# Altium PCB HEAT.PcbDoc
Units mil, origin at the board's own origin, x right, y up, seen from the top; angles counter-clockwise.
Board outline 3937.01 x 3937.01 mil, 2 copper layers (Top Layer, Bottom Layer), stack 12.8 mil thick; 126 components, 101 nets, 447 pads, 230 vias.
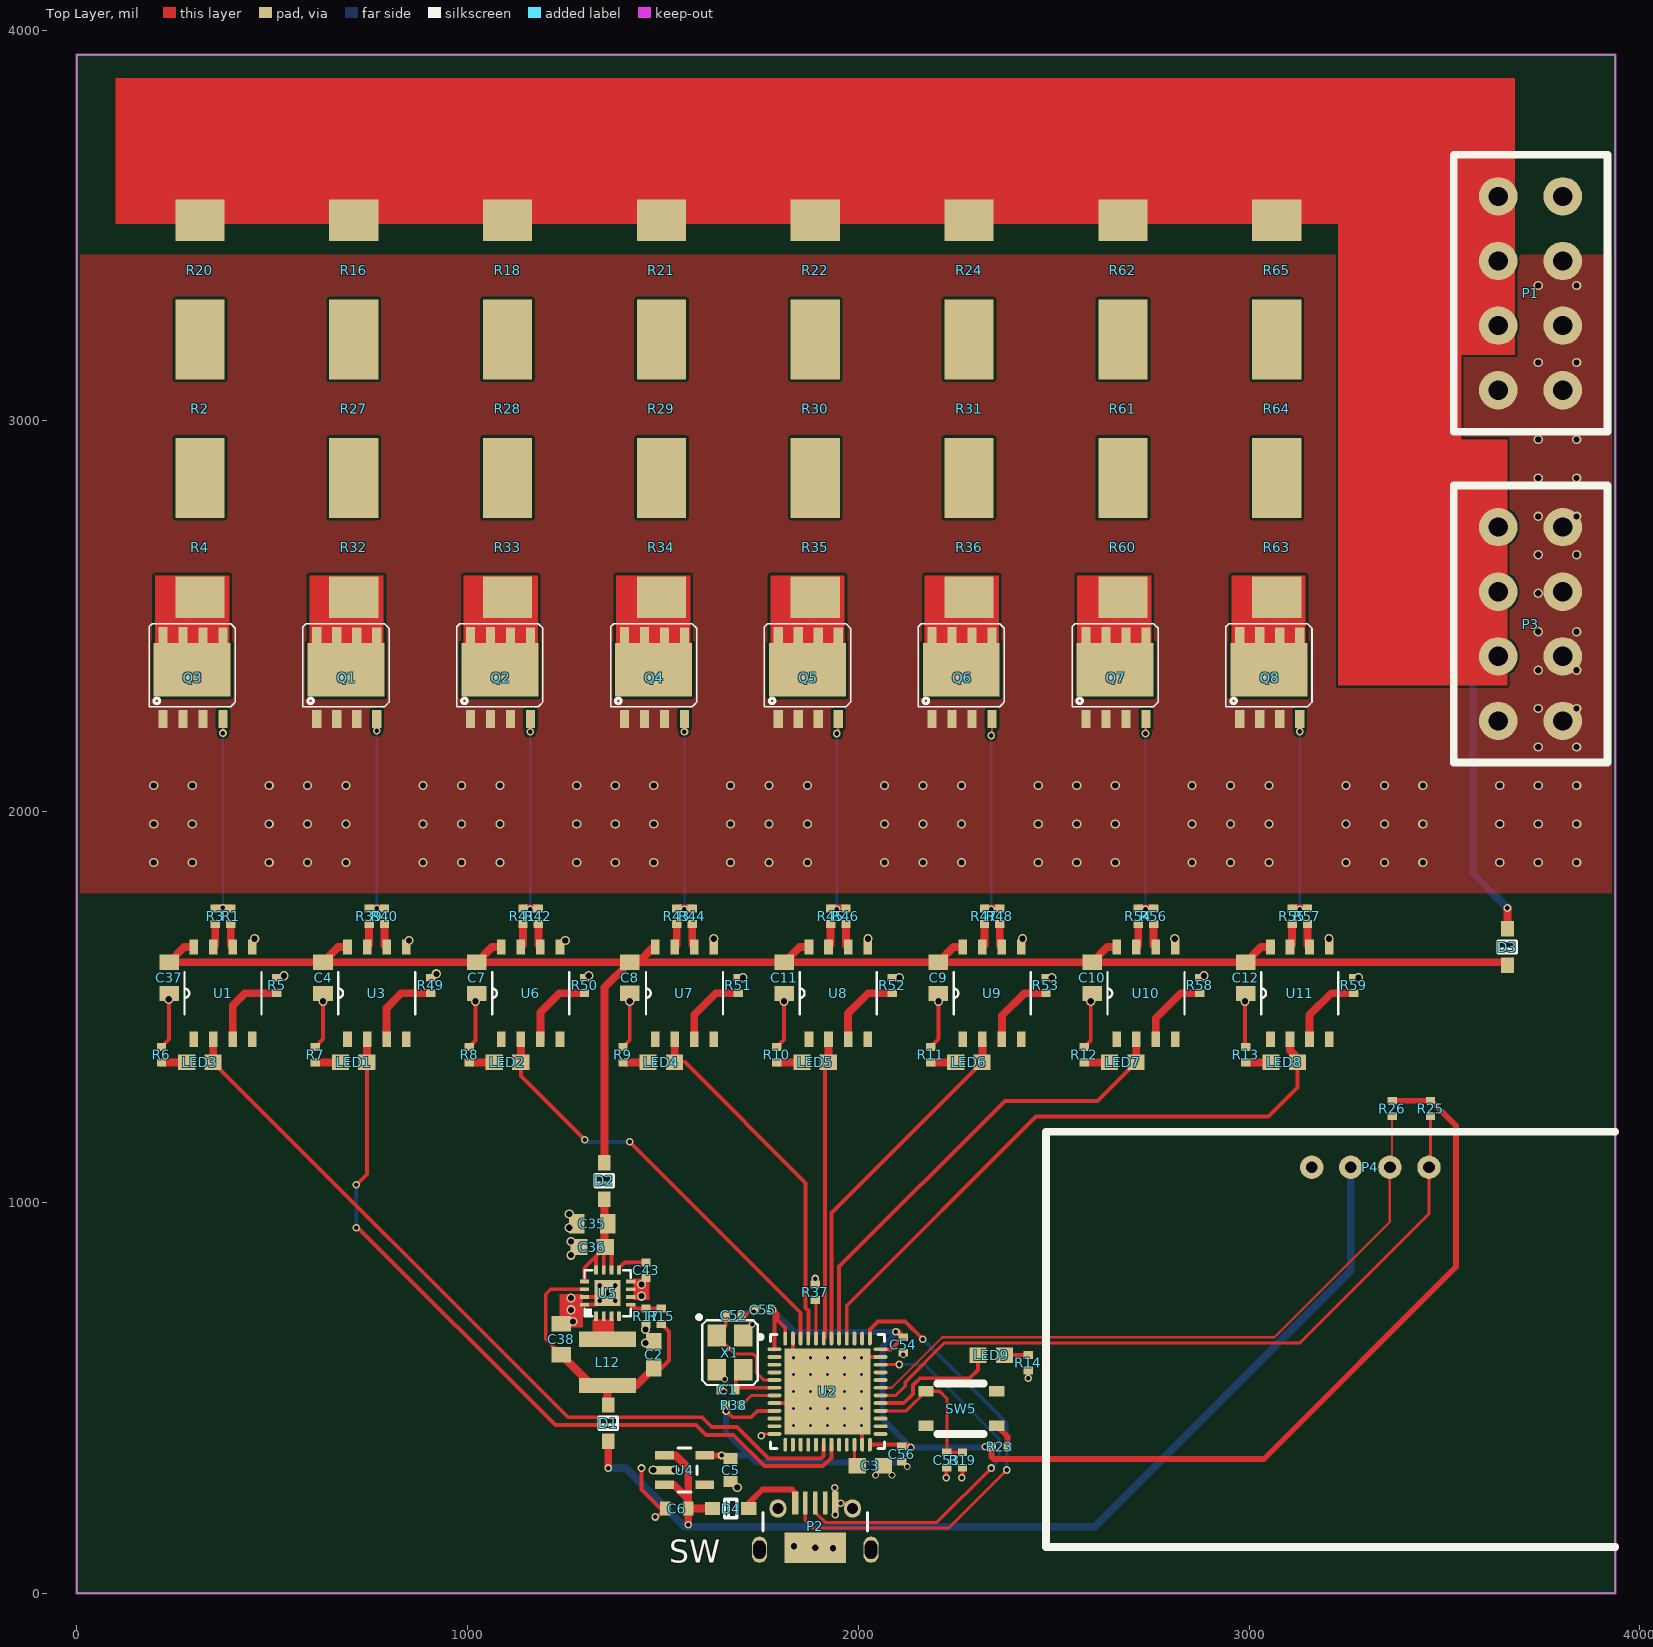
[diagram p0: Top Layer view]
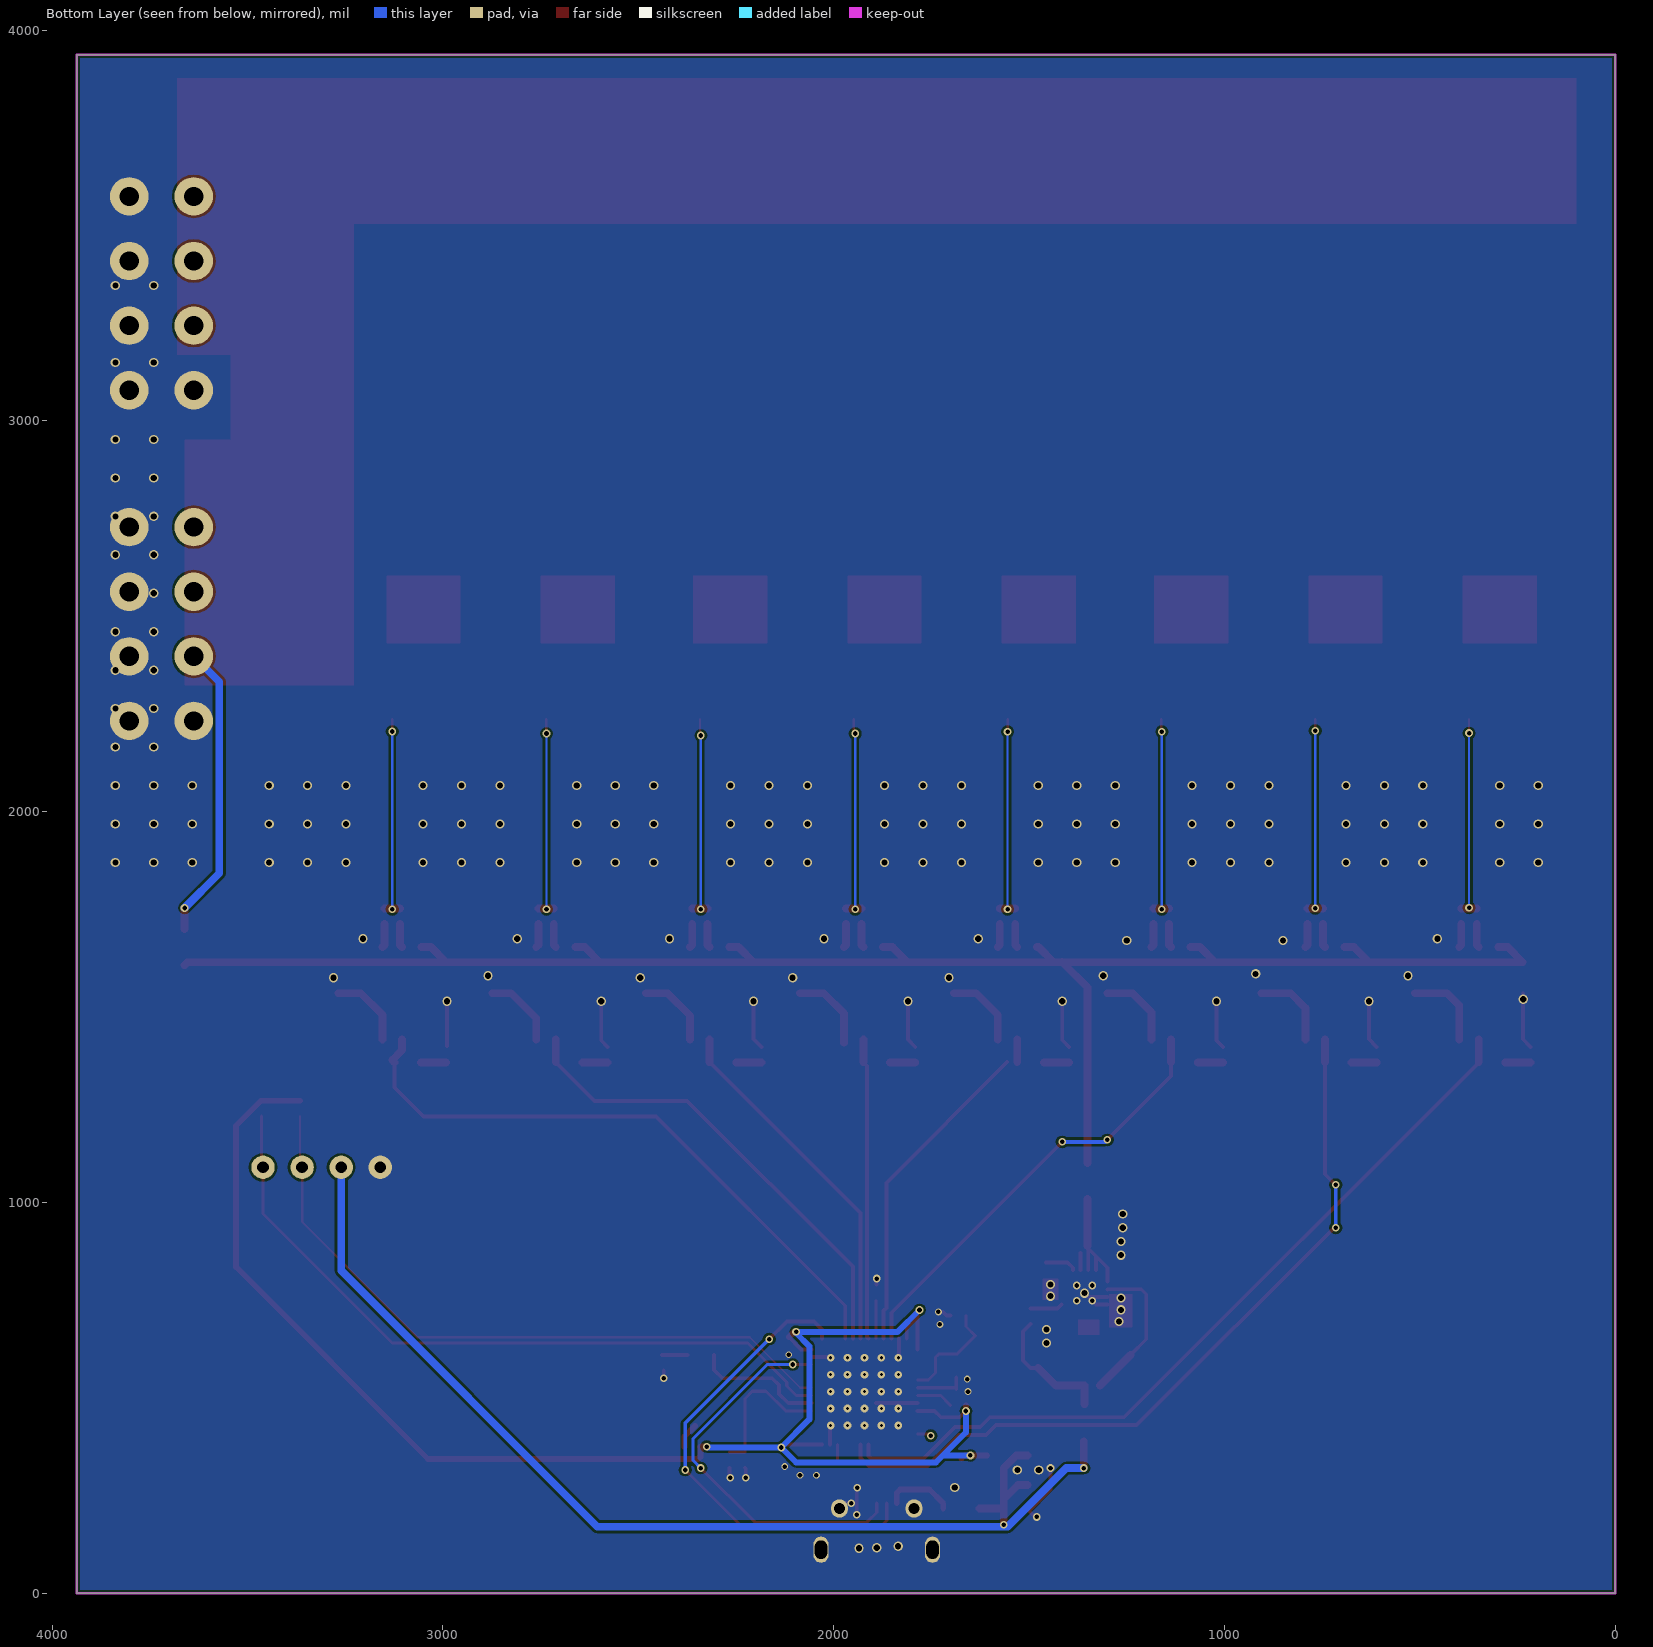
[diagram p1: Bottom Layer view, seen from below]

## Layer stack, top to bottom
Top Solder: solder mask 0.4, Solder Resist, Dk 3.5
Top Layer: signal copper 1.4
Dielectric 1: core 10, FR-4, Dk 4.2
Bottom Layer: signal copper 1.4
Bottom Solder: solder mask 0.4, Solder Resist, Dk 3.5

## Board outline
0,0 3937.01,0 3937.01,3937.01 0,3937.01

## Design rules (kind name [scope] priority, off if disabled: settings)
Clearance Clearance_1 [(InNamedPolygon('Bottom Layer-No Net')) vs Not InNet('GND')] p1: gap=15 ignorepadtopadclearanceinfootprint=FALSE except(0: Arc-Hole Track-Hole SMDPad-Hole THPad-Hole Via-Hole Fill-Hole Poly-Hole Region-Hole Text-Hole)
Clearance [All] p2: gap=6 ignorepadtopadclearanceinfootprint=FALSE except(0: Arc-Hole Track-Hole SMDPad-Hole THPad-Hole Via-Hole Fill-Hole Poly-Hole Region-Hole Text-Hole)
DiffPairsRouting [All] p1: maxlimit=10 minlimit=10 mostfreqgap=10 toplayer_minwidth=5.98 toplayer_maxwidth=15 toplayer_prefwidth=15 bottomlayer_minwidth=5.98 bottomlayer_maxwidth=15 bottomlayer_prefwidth=15 maxuncoupledlength=500
MinimumSolderMaskSliver [All] p1 off: minsoldermaskwidth=10
PlaneClearance [All] p1: clearance=10
PlaneConnect [All] p1: planeconnectstyle=Direct reliefexpansion=20 reliefentries=4 reliefconductorwidth=10 reliefairgap=10
PolygonConnect [All] p1: connectstyle=Direct reliefconductorwidth=10 reliefentries=4 polygonreliefangle="90 Angle" airgapwidth=10
RoomDefinition power [InComponentClass('power')] p1 off: confinementstyle=ConfineIn formatcopy=TRUE lockcomponents=FALSE outline 3977.45,95.87 6398.71,95.87 6398.71,450.2 3977.45,450.2
RoomDefinition HEAT [InComponentClass('HEAT')] p2 off: confinementstyle=ConfineIn formatcopy=TRUE lockcomponents=FALSE outline 3988,65 4608,65 4608,405 3988,405
RoomDefinition MCU [InComponentClass('MCU')] p3 off: confinementstyle=ConfineIn formatcopy=TRUE lockcomponents=FALSE outline 2078,165 4423,165 4423,405 2078,405
RoutingVias [All] p1: holewidth=12 width=20 viastyle="Through Hole" minholewidth=11.81 minwidth=19.68 maxholewidth=28 maxwidth=50
SilkToBoardRegionClearance [All] p1 off:
SilkToSilkClearance [All] p1 off: silktosilkclearance=10
SilkToSolderMaskClearance [IsPad] p1 off: minsilkscreentomaskgap=10 clearancetoexposedcopper=TRUE
SolderMaskExpansion [All] p1: expansion=4
Width [All] p1: maxlimit=60 minlimit=6 preferedwidth=6
23 further rules are at their usual default settings.

## Classes and differential pairs
component class power: C2 C5 C6 C35 C36 C38 C43 D1 D2 L12 R15 R17 U4 U5
component class MCU: C1 C3 C52 C53 C54 C55 C56 D4 LED1 LED2 LED3 LED4 LED5 LED6 LED7 LED8 LED9 P2 P4 R6 R7 R8 R9 R10 R11 R12 R13 R14 R19 R23 R25 R26 R37 R38 SW5 U2 X1
component class HEAT: C4 C7 C8 C9 C10 C11 C12 C37 D3 P1 P3 Q1 Q2 Q3 Q4 Q5 Q6 Q7 Q8 R1 R2 R3 R4 R5 R16 R18 R20 R21 R22 R24 R27 R28 R29 R30 R31 R32 R33 R34 R35 R36 R39 R40 R41 R42 R43 R44 R45 R46 R47 R48 R49 R50 R51 R52 R53 R54 R55 R56 R57 R58 R59 R60 R61 R62 R63 R64 R65 U1 U3 U6 U7 U8 U9 U10 U11

## Components (designator, comment, footprint, x,y, rotation, side; value= is the part's Value field where it differs from the comment)
C1 "Cap" 0402 1666.26,520.75 r0 top value=20pF
C2 "Cap" 0603 1476.38,610.24 r270 top value="4.7uF 25V"
C3 "Cap" 0603 2031.26,325.75 r180 top value=4.7uF
C4 "10uF" 0805 629.92,1574.8 r90 top
C5 "4.7uF" 0603L 1673.23,314.96 r90 top
C6 "4.7uF" 0603L 1535.43,216.54 r0 top
C7 "10uF" 0805 1023.62,1574.8 r90 top
C8 "10uF" 0805 1415,1575 r90 top
C9 "10uF" 0805 2204.72,1574.8 r90 top
C10 "10uF" 0805 2598.43,1574.8 r90 top
C11 "10uF" 0805 1811.02,1574.8 r90 top
C12 "10uF" 0805 2992.13,1574.8 r90 top
C35 "Cap" 0805 1318.9,944.88 r180 top value="22uF 25V"
C36 "Cap" 0603 1318.9,885.83 r180 top value="4.7uF 25V"
C37 "10uF" 0805 236.22,1574.8 r90 top
C38 "Cap" 0805 1240.16,649.61 r270 top value="22uF 25V"
C43 "3.3nF" 0402 1456.69,826.77 r270 top
C52 "Cap" 0402 1681.26,710.75 r180 top value=20pF
C53 "Cap" 0402 2226.81,340.51 r90 top value=10nF
C54 "Cap" 0402 2115,635 r90 top value=0.1uF
C55 "Cap" 0402 1755,725 r0 top value=0.1uF
C56 "Cap" 0402 2111.26,355.75 r90 top value=0.1uF
D1 "Diode 1N4148" LC-SOD-323 1360,435 r90 top
D2 "Diode 1N4148" LC-SOD-323 1350,1055 r90 top
D3 "Diode 1N4148" LC-SOD-323 3661.42,1653.54 r90 top
D4 "Diode 1N4148" LC-SOD-323 1673.23,216.54 r0 top
L12 "2.2uH" L4015 1358.27,649.61 r270 top
LED1 "" 0603 708.66,1358.27 r180 top
LED2 "" 0603 1102.36,1358.27 r180 top
LED3 "" 0603 314.96,1358.27 r180 top
LED4 "" 0603 1496.06,1358.27 r180 top
LED5 "" 0603 1889.76,1358.27 r180 top
LED6 "" 0603 2283.46,1358.27 r180 top
LED7 "" 0603 2677.17,1358.27 r180 top
LED8 "" 0603 3090.55,1358.27 r180 top
LED9 "" 0603 2339.96,609.17 r0 top
P1 "PCIE-8P" PCIE_8PIN 3720.47,3326.77 r270 top
P2 "SWD_MicroUSB" MICRO-YZX 1889.76,0 r0 top
P3 "PCIE-8P" PCIE_8PIN 3720.47,2480.31 r270 top
P4 "UART/I2C" 4P 3310.59,1089.76 r180 top
Q1 "NMOS" BSC025N03MS 688.98,2362.2 r270 top
Q2 "NMOS" BSC025N03MS 1082.68,2362.2 r270 top
Q3 "NMOS" BSC025N03MS 295.28,2362.2 r270 top
Q4 "NMOS" BSC025N03MS 1476.38,2362.2 r270 top
Q5 "NMOS" BSC025N03MS 1870.08,2362.2 r270 top
Q6 "NMOS" BSC025N03MS 2263.78,2362.2 r270 top
Q7 "NMOS" BSC025N03MS 2657.48,2362.2 r270 top
Q8 "NMOS" BSC025N03MS 3051.18,2362.2 r270 top
R1 "0R" 0402 393.7,1732.28 r270 top value=0Ohm
R2 "0.4R" 2512 314.96,3031.5 r270 top value=0Ohm
R3 "10R" 0402 354.33,1732.28 r270 top value=0Ohm
R4 "0.4R" 2512 314.96,2677.17 r270 top value=0Ohm
R5 "10R" 0402 511.81,1555.12 r90 top value=0Ohm
R6 "10k" 0402 216.54,1377.95 r90 top value=0Ohm
R7 "10k" 0402 610.24,1377.95 r90 top value=0Ohm
R8 "10k" 0402 1003.94,1377.95 r90 top value=0Ohm
R9 "10k" 0402 1397.64,1377.95 r90 top value=0Ohm
R10 "10k" 0402 1791.34,1377.95 r90 top value=0Ohm
R11 "10k" 0402 2185.04,1377.95 r90 top value=0Ohm
R12 "10k" 0402 2578.74,1377.95 r90 top value=0Ohm
R13 "10k" 0402 2992.13,1377.95 r90 top value=0Ohm
R14 "10k" 0402 2435,590 r270 top value=0Ohm
R15 "51k 1%" 0402 1496.06,708.66 r90 top
R16 "0.4R" 2512 708.66,3385.83 r270 top value=0Ohm
R17 "10k 1%" 0402 1456.69,708.66 r270 top
R18 "0.4R" 2512 1102.36,3385.83 r270 top value=0Ohm
R19 "10k" 0402 2266.81,340.51 r90 top value=0Ohm
R20 "0.4R" 2512 314.96,3385.83 r270 top value=0Ohm
R21 "0.4R" 2512 1496.06,3385.83 r270 top value=0Ohm
R22 "0.4R" 2512 1889.76,3385.83 r270 top value=0Ohm
R23 "1k" 0402 2362.2,374.02 r180 top value=0Ohm
R24 "0.4R" 2512 2283.46,3385.83 r270 top value=0Ohm
R25 "10k" 0402 3464.57,1240.16 r90 top value=0Ohm
R26 "10k" 0402 3366.14,1240.16 r90 top value=0Ohm
R27 "0.4R" 2512 708.66,3031.5 r270 top value=0Ohm
R28 "0.4R" 2512 1102.36,3031.5 r270 top value=0Ohm
R29 "0.4R" 2512 1496.06,3031.5 r270 top value=0Ohm
R30 "0.4R" 2512 1889.76,3031.5 r270 top value=0Ohm
R31 "0.4R" 2512 2283.46,3031.5 r270 top value=0Ohm
R32 "0.4R" 2512 708.66,2677.17 r270 top value=0Ohm
R33 "0.4R" 2512 1102.36,2677.17 r270 top value=0Ohm
R34 "0.4R" 2512 1496.06,2677.17 r270 top value=0Ohm
R35 "0.4R" 2512 1889.76,2677.17 r270 top value=0Ohm
R36 "0.4R" 2512 2283.46,2677.17 r270 top value=0Ohm
R37 "Res2" 0402 1890,770 r90 top value=10k
R38 "Res2" 0402 1681.26,480.75 r0 top value=10k
R39 "10R" 0402 748.03,1732.28 r270 top value=0Ohm
R40 "0R" 0402 787.4,1732.28 r270 top value=0Ohm
R41 "10R" 0402 1141.73,1732.28 r270 top value=0Ohm
R42 "0R" 0402 1181.1,1732.28 r270 top value=0Ohm
R43 "10R" 0402 1535.43,1732.28 r270 top value=0Ohm
R44 "0R" 0402 1574.8,1732.28 r270 top value=0Ohm
R45 "10R" 0402 1929.13,1732.28 r270 top value=0Ohm
R46 "0R" 0402 1968.5,1732.28 r270 top value=0Ohm
R47 "10R" 0402 2322.83,1732.28 r270 top value=0Ohm
R48 "0R" 0402 2362.2,1732.28 r270 top value=0Ohm
R49 "10R" 0402 905.51,1555.12 r90 top value=0Ohm
R50 "10R" 0402 1299.21,1555.12 r90 top value=0Ohm
R51 "10R" 0402 1692.91,1555.12 r90 top value=0Ohm
R52 "10R" 0402 2086.61,1555.12 r90 top value=0Ohm
R53 "10R" 0402 2480.31,1555.12 r90 top value=0Ohm
R54 "10R" 0402 2716.54,1732.28 r270 top value=0Ohm
R55 "10R" 0402 3110.24,1732.28 r270 top value=0Ohm
R56 "0R" 0402 2755.91,1732.28 r270 top value=0Ohm
R57 "0R" 0402 3149.61,1732.28 r270 top value=0Ohm
R58 "10R" 0402 2874.02,1555.12 r90 top value=0Ohm
R59 "10R" 0402 3267.72,1555.12 r90 top value=0Ohm
R60 "0.4R" 2512 2677.17,2677.17 r270 top value=0Ohm
R61 "0.4R" 2512 2677.17,3031.5 r270 top value=0Ohm
R62 "0.4R" 2512 2677.17,3385.83 r270 top value=0Ohm
R63 "0.4R" 2512 3070.87,2677.17 r270 top value=0Ohm
R64 "0.4R" 2512 3070.87,3031.5 r270 top value=0Ohm
R65 "0.4R" 2512 3070.87,3385.83 r270 top value=0Ohm
SW5 "SW-PB" SW3x4 2263.78,472.44 r0 top
U1 "EG2131" SO8 374.02,1535.43 r90 top
U2 "STM32F401CCU6" STM-UFQFPN48_N 1921.26,515.75 r0 top
U3 "EG2131" SO8 767.72,1535.43 r90 top
U4 "LP5907" SOT23-5 1555.12,314.96 r270 top
U5 "TPS62130" TPS62130 1358.27,767.72 r90 top
U6 "EG2131" SO8 1161.42,1535.43 r90 top
U7 "EG2131" SO8 1555.12,1535.43 r90 top
U8 "EG2131" SO8 1948.82,1535.43 r90 top
U9 "EG2131" SO8 2342.52,1535.43 r90 top
U10 "EG2131" SO8 2736.22,1535.43 r90 top
U11 "EG2131" SO8 3129.92,1535.43 r90 top
X1 "24.000 KHz 3.2x2.5mm 8-10pf" OSCILLATOR-3.2X2.5 1671.26,615.75 r270 top

## Footprints (in the part's own frame and the unit in brackets; to place one, negate y for a bottom-side part, rotate by r counter-clockwise, add the part's x,y. Pads: shape width x height; smd on the part's side, far side on the other; paste and mask are expansions set on the pad)
4P [mil]
  round 60 hole 30: 1(-150,0) 2(-50,0) 3(50,0) 4(150,0)
0402 [mil] "0402-RES"
  rect 20x24 smd: 1(-19.69,0) 2(20,0)
0603 [mil] "0603-RES"
  rect 44x40 smd: 1(-33.46,0) 2(34,0)
  body extent -31,-16 31,16, height 31
0603L [mm]
  rect 0.7x0.9 smd: 1(-0.75,0) 2(0.75,0)
  body extent -0.8,-0.4 0.8,0.4, height 0.8
0805 [mil]
  rect 39.37x50 smd: 1(-40,0) 2(40,0)
  body extent -50,-30 50,30, height 31
2512 [mm]
  rect 2.7x3.2 smd: 1(-3.25,0) 2(3.25,0)
BSC025N03MS [mm]
  rect 1.2x0.6 smd: D(-2.215,-0.605) D(-2.215,-1.905) D(-2.175,1.995) D(-2.175,0.695) G(3.175,1.995) S(3.175,-0.605) S(3.175,0.695) S(3.175,-1.905)
  rect 3.5x5 smd: D(-0.025,-0.005)
  silkscreen extent -3.02,-2.8 2.38,2.8
L4015 [mm]
  rect 1x3.7 smd: 1(0,0) 2(3,0)
LC-SOD-323 [mm]
  rect 1x0.83 smd: 1(1.18,0) 2(-1.18,0)
  silkscreen extent -0.4,-0.6 0.4,0.6, body extent -1.35,-0.62 1.35,0.63, height 1.1
MICRO-YZX [mm]
  rect 0.4x1.5 smd: 1(-1.3,5.85) 5(1.3,5.85)
  rect 0.3x1.5 smd: 2(-0.65,5.85) 3(0,5.85) 4(0.65,5.85)
  oval 1x1.7 hole 0.8 slot 1.2 at 90 deg: 5(-3.625,2.82) 5(3.625,2.82)
  oval 1.1x1.2 hole 0.7: 5(-2.425,5.5) 5(2.425,5.5)
  rect 4x2 smd: 5(0,2.95)
  silkscreen extent -3.4,4.05 3.4,5.25, body extent -4.02,0.33 3.98,5.93, height 2.6
OSCILLATOR-3.2X2.5 [mil] "OSCILLATOR-3.2X2.5"
  rect 56x48 smd: 1(-43.31,-33.46) 2(44,-33.46) 3(44,34) 4(-43.31,34)
  silkscreen extent -95,-83 83,71
PCIE_8PIN [mm]
  round 2.5 hole 1.25: 1(-6.3,-2.1) 2(-2.1,-2.1) 3(2.1,-2.1) 4(6.3,-2.1) 5(-6.3,2.1) 6(-2.1,2.1) 7(2.1,2.1) 8(6.3,2.1)
  silkscreen extent -9,-5 9,5
SO8 [mm]
  rect 1x0.559 smd: 1(-3,1.905) 2(-3,0.635) 3(-3,-0.635) 4(-3,-1.905) 5(3,-1.905) 6(3,-0.635) 7(3,0.635) 8(3,1.905)
  silkscreen extent -1.37,-2.5 1.37,2.5, body extent -3,-2.45 3,2.45, height 1.63
SOT23-5 [mil] "SOT23-5"
  rect 22x48 smd: 1(-37.4,-51.19) 2(0,-51.19) 3(38,-51.19) 4(38,52) 5(-37.4,52)
  silkscreen extent -56,-17 56,32
STM-UFQFPN48_N [mm] "QFN, 48-Leads, Body 7.1x7.1mm, Pitch 0.5mm, Thermal Pad 5.6x5.6mm, IPC Medium Density"
  oval 0.9x0.25 smd: 1(-3.45,2.75) 2(-3.45,2.25) 3(-3.45,1.75) 4(-3.45,1.25) 5(-3.45,0.75) 6(-3.45,0.25) 7(-3.45,-0.25) 8(-3.45,-0.75) 9(-3.45,-1.25) 10(-3.45,-1.75) 11(-3.45,-2.25) 12(-3.45,-2.75) 25(3.45,-2.75) 26(3.45,-2.25) 27(3.45,-1.75) 28(3.45,-1.25) 29(3.45,-0.75) 30(3.45,-0.25) 31(3.45,0.25) 32(3.45,0.75) 33(3.45,1.25) 34(3.45,1.75) 35(3.45,2.25) 36(3.45,2.75)
  oval 0.25x0.9 smd: 13(-2.75,-3.45) 14(-2.25,-3.45) 15(-1.75,-3.45) 16(-1.25,-3.45) 17(-0.75,-3.45) 18(-0.25,-3.45) 19(0.25,-3.45) 20(0.75,-3.45) 21(1.25,-3.45) 22(1.75,-3.45) 23(2.25,-3.45) 24(2.75,-3.45) 37(2.75,3.45) 38(2.25,3.45) 39(1.75,3.45) 40(1.25,3.45) 41(0.75,3.45) 42(0.25,3.45) 43(-0.25,3.45) 44(-0.75,3.45) 45(-1.25,3.45) 46(-1.75,3.45) 47(-2.25,3.45) 48(-2.75,3.45)
  rect 5.6x5.6 smd: 49(0,0)
  silkscreen extent -4.47,-3.7 3.7,3.7, body extent -3.55,-3.55 3.55,3.55, height 0.6
SW3x4 [mm]
  rect 1x0.7 smd: 1(-2.3,1.125) 2(2.3,-1.125) 3(2.3,1.125) 4(-2.3,-1.125)
  silkscreen extent -1.58,-1.65 1.45,1.63, body extent -2,-1.5 2,1.5, height 2.6
TPS62130 [mm]
  rect 1.7x1.7 smd: 0(0,0)
  rect 0.6x0.25 smd: 1(-1.5,0.75) 2(-1.5,0.25) 3(-1.5,-0.25) 4(-1.5,-0.75) 9(1.5,-0.75) 10(1.5,-0.25) 11(1.5,0.25) 12(1.5,0.75)
  rect 0.25x0.6 smd: 5(-0.75,-1.5) 6(-0.25,-1.5) 7(0.25,-1.5) 8(0.75,-1.5) 13(0.75,1.5) 14(0.25,1.5) 15(-0.25,1.5) 16(-0.75,1.5)
  silkscreen extent -1.5,-1.5 1.5,1.5, body extent -1.5,-1.5 1.5,1.5, height 0.6

## Part data
C1 C2 C3 C35 C36 C38 C52 C53 C54 C55 C56: "Capacitor", LatestRevisionDate=17-Jul-2002, LatestRevisionNote="Re-released for DXP Platform.", PackageDescription="Radial Cap, Thru-Hole; 2 Leads; 0.3 in Pin Spacing", PackageReference=RAD-0.3, Published=8-Jun-2000, Publisher="Altium Limited"
C4 C7 C8 C9 C10 C11 C12 C37: library part CAP0402-CAP, "<b>Capacitor</b> / Standard 0603 ceramic capacitor, and 0.1\" leaded capacitor.", PARTNO=CC0402ZRY5V7BB104
C5 C6 C43: library part Cap, "Capacitor", LatestRevisionDate=17-Jul-2002, LatestRevisionNote="Re-released for DXP Platform.", PackageDescription="Radial Cap, Thru-Hole; 2 Leads; 0.3 in Pin Spacing", PackageReference=RAD-0.3, Published=8-Jun-2000, Publisher="Altium Limited"
D1 D2 D3 D4: "High Conductance Fast Diode", Code_JEDEC=DO-204-AH, ComponentLink1Description="Manufacturer Link", ComponentLink1URL=http://www.fairchildsemi.com/, ComponentLink2Description=Datasheet, ComponentLink2URL=http://www.fairchildsemi.com/ds/1N%2F1N4148.pdf, DatasheetVersion=1997, LatestRevisionDate=17-Jul-2002, LatestRevisionNote="Re-released for DXP Platform.", PackageDescription="Diode, Axial; Body 3.8 x 1.9 mm (LxDia. max), Lead Dia. 0.53 mm (max)", PackageReference=DO-35, Published=8-Jun-2000, Publisher="Altium Limited"
L12: library part Inductor, "Inductor", Code_IEC=1005, Code_JEITA=0402, LatestRevisionDate=29-May-2009, LatestRevisionNote="IPC-7351 Footprint Added.", PackageDescription="Chip Inductor", PackageReference=0402-A, Published=8-Jun-2000, Publisher="Altium Limited"
LED1 LED2 LED3 LED4 LED5 LED6 LED7 LED8 LED9: library part LED0, "Typical INFRARED GaAs LED", LatestRevisionDate=08-Jul-2005, LatestRevisionNote="Mech Layer 1 removed.", PackageDescription="LED; 2 Leads", PackageReference=LED-0, Published=8-Jun-2000, Publisher="Altium Limited"
P2: "Connector SMD USB Micro Type B middle mount", Manufacturer 1="Molex Inc", Package / Case=SMD, Supplier Part Number 1=WM17142CT-ND, SCDType=undef, Supplier 1=Digi-Key
P4: library part 4PSocket
R1 R3 R5 R6 R7 R8 R9 R10 R11 R12 R13 R14 R15 R17 R19 R23 R25 R26 R39 R40 R41 R42 R43 R44 R45 R46 R47 R48 R49 R50 R51 R52 R53 R54 R55 R56 R57 R58 R59: library part Res2, "Resistor", LatestRevisionDate=17-Jul-2002, LatestRevisionNote="Re-released for DXP Platform.", PackageDescription="Axial Device, Thru-Hole; 2 Leads; 0.4 in Pin Spacing", PackageReference=AXIAL-0.4, Published=8-Jun-2000, Publisher="Altium Limited"
R2 R4 R16 R18 R20 R21 R22 R24 R27 R28 R29 R30 R31 R32 R33 R34 R35 R36 R60 R61 R62 R63 R64 R65: library part Res2, "电阻", LatestRevisionDate=17-Jul-2002, LatestRevisionNote="Re-released for DXP Platform.", PackageDescription="Axial Device, Thru-Hole; 2 Leads; 0.4 in Pin Spacing", PackageReference=AXIAL-0.4, Published=8-Jun-2000, Publisher="Altium Limited"
R37 R38: "Resistor", LatestRevisionDate=17-Jul-2002, LatestRevisionNote="Re-released for DXP Platform.", PackageDescription="Axial Device, Thru-Hole; 2 Leads; 0.4 in Pin Spacing", PackageReference=AXIAL-0.4, Published=8-Jun-2000, Publisher="Altium Limited"
SW5: "Switch", LatestRevisionDate=17-Jul-2002, LatestRevisionNote="Re-released for DXP Platform.", PackageDescription="Switch; 2 Leads", PackageReference=SPST-2, Published=24-Mar-1999, Publisher="Altium Limited"
U2: "ARM Cortex-M4 32-bit MCU+FPU, 105 DMIPS, 256 kB Flash, 64 kB Internal RAM, 36 I/Os, 48-pin UFQFPN, -40 to 85 degC, Tray", I/Os (High Current)=36, Manufacturer=STMicroelectronics, Operating Frequency(F) (Processor speed) (MHz)=84, Supplier Part Number 1=19X6217, Supply Voltage(Vcc) max (V)=3.6, Supply Voltage(Vcc) min (V)=1.8, ComponentLink1Description="Manufacturer URL", ComponentLink1URL=http://www.st.com/web/en/home.html, ComponentLink2Description=Datasheet, ComponentLink2URL=http://www.st.com/st-web-ui/static/active/en/resource/technical/document/data_brief/DM00071938.pdf, ComponentLink3Description="Package Specification", ComponentLink3URL=http://www.st.com/st-web-ui/static/active/en/resource/technical/document/data_brief/DM00071938.pdf, Core="ARM Cortex-M4", DatasheetVersion="Rev. 1", FLASH Size (Prog) (kB)=256, Internal RAM Size (kB)=64, Mounting Technology="Surface Mount", PackageDescription="48-Pin Ultra Thin Fine Pitch Quad Flat No-Lead, 7 x 7 x 0.6 mm Body, 0.5 mm Pitch, Exposed Pad", PackageReference=UFQFPN48, PackageVersion="Rev. 1, 04/2013", Packing=Tray, PartNumber=STM32F401CCU6, Supplier 1=Newark, Supplier 2=Mouser, Supplier Part Number 2=511-STM32F401CCU6
X1: library part OSCILLATOR-3.2X2.5, "Crystal Oscillator in 3.2x2.5 SMD"

## Via types
v1: diameter 23.62, hole 15.75, Top Layer to Bottom Layer, 150 vias
v2: diameter 19.68, hole 11.81, Top Layer to Bottom Layer, 47 vias
v3: diameter 19.68, hole 7.87, Top Layer to Bottom Layer, 25 vias
v4: diameter 17.72, hole 11.81, Top Layer to Bottom Layer, 8 vias

## Nets (pads, with @x,y where several pads share a name; then routed paths per layer and width w, separated by ;. In a path a pad name is that pad's centre, name@x,y a point inside that pad or via, vN(x,y) a via of type N, cw(c..) or ccw(c..) an arc to the next point about the centre after c; other vN are vias at no path point)
3.3D: C5.2 C54.2 C55.2 C56.2 R23.2 R25.2 R26.2 R38.1 U2.1 U2.9 U2.24 U2.36 U2.48 U4.5 | length 4112.9
  Top Layer w10: v2(1661.57,466.06) 1677.64,450 1725,450 1741.54,466.54 U2.9 ; U2.1 v2@1785.43,719.57 ; 1791.26,700.75 1812.99,679.02 U2.48 ; U2.24 2127.09,379.92 v2(2134.26,372.75) ; U2.36 2084.02,624.02 C54.2
  Top Layer w15: U4.5 v2(1650,352.36) 1665.35,352.36 C5.2 ; v2(1661.57,466.06) R38.1 ; v2(1780.26,724.75) 1785.43,719.57 1791.26,713.75 1791.26,700.75 ; v2(2096.26,668.75) 2101.25,668.75 C54.2 ; v2(2325,375) R23.2@2341.22,375 ; R23.2 R23.2@2341.22,375 ; R26.2 R25.2 3465.97,1260.16 3530,1196.13 3530,835 3038.34,343.34 2346.66,343.34 2341.22,348.78 R23.2@2341.22,375
  Bottom Layer w15: v2(1650,352.36) 1720.65,352.36 ; v2(1661.57,466.06) 1661.57,411.43 1720.65,352.36 ; v2(1780.26,724.75) 1836.26,668.75 v2(2096.26,668.75) 2096.26,665.75 2062.26,631.75 2062.26,444.75 v2(2134.26,372.75) ; v2(2325,375) 2322.75,372.75 v2(2134.26,372.75) ; 1720.65,352.36 1738.26,334.75 2096.26,334.75 v2(2134.26,372.75)
5V: C6.2 D1.2 D4.2 P4.3 U4.1 U4.3 | length 2924.5
  Top Layer w20: v2(1360,320) D1.2 ; U4.3 1528.04,276.96 1564.96,240.04 ; U4.1 1532.64,352.36 1564.96,320.04 1564.96,240.04 ; v2(1564.96,175.04) C6.2 ; D4.2 C6.2 ; C6.2 1564.96,240.04
  Bottom Layer w20: v2(1360,320) 1405,320 1555,170 2605,170 3260.59,825.59 P4.3
12V: C4.2 C7.2 C8.2 C9.2 C10.2 C11.2 C12.2 C37.2 D2.1 D3.2 U1.8 U3.8 U6.8 U7.8 U8.8 U9.8 U10.8 U11.8 | length 4580.2
  Top Layer w20: U1.8 274.96,1653.54 C37.2 C4.2 ; U3.8 668.66,1653.54 C4.2 ; U6.8 1062.36,1653.54 C7.2 ; D2.1@1350,1101.18 1350,1550 C8.2@1414.8,1614.8 ; C8.2 C8.2@1414.8,1614.8 ; U7.8 1475.75,1653.54 C8.2@1437.01,1614.8 ; U8.8 1849.76,1653.54 C11.2 ; U9.8 2243.46,1653.54 C9.2 ; U10.8 2637.17,1653.54 C10.2 ; U11.8 3030.87,1653.54 C12.2 ; D3.2 3653.7,1614.8 C12.2 ; C4.2 C7.2 ; C7.2 C8.2@1414.8,1614.8 ; C8.2@1414.8,1614.8 C8.2@1437.01,1614.8 ; C8.2@1437.01,1614.8 C11.2 ; C11.2 C9.2 ; C9.2 C10.2 ; C10.2 C12.2
12V-E: D3.1 P1.1 P1.2 P1.3 P3.1 P3.2 P3.3 R16.1 R18.1 R20.1 R21.1 R22.1 R24.1 R62.1 R65.1 | length 761.4
  Top Layer w20: D3.1 v2(3661.42,1753.58)
  Bottom Layer w20: P3.3 3572.58,2332.43 3572.58,1842.42 v2(3661.42,1753.58)
GND: C1.1 C2.1 C3.1 C4.1 C5.1 C6.1 C7.1 C8.1 C9.1 C10.1 C11.1 C12.1 C35.2 C36.2 C37.1 C38.1 C43.2 C52.1 C53.1 C54.1 C55.1 C56.1 P1.4 P1.5 P1.6 P1.7 P1.8 P2.5 P3.4 P3.5 P3.6 P3.7 P3.8 P4.4 Q1.S Q2.S Q3.S Q4.S Q5.S Q6.S Q7.S Q8.S R5.2 R6.2 R7.2 R8.2 R9.2 R10.2 R11.2 R12.2 R13.2 R14.2 R17.2 R19.1 R37.2 R49.2 R50.2 R51.2 R52.2 R53.2 R58.2 R59.2 U1.5 U2.8 U2.23 U2.35 U2.47 U2.49 U3.5 U4.2 U5.0 U5.6 U5.7 U5.8 U5.15 U5.16 U6.5 U7.5 U8.5 U9.5 U10.5 U11.5 X1.2 X1.4 | length 1732.7
  Top Layer w10: R6.2 236.22,1417.64 C37.1 ; R7.2 630,1417.72 v1(630,1515) ; R8.2 1020,1414.02 v1(1020,1515) ; U5.16 U5.0@1328.74,738.19 ; U5.15 U5.0@1348.43,757.87 ; R9.2 1415,1415.31 v1(1415,1515) ; v2(1445,320) 1445,265 1493.46,216.54 C6.1 1484.37,195 v2(1480,195) ; C52.1 1711.26,710.75 1720.26,719.75 v4(1732.26,719.75) ; U2.8 U2.49@1891.73,486.22 ; R10.2 1810,1416.61 v1(1810,1515) ; U2.49@1832.68,604.33 U2.47 ; R37.2 v2(1890,805) ; v2(1940,270) 1940.94,269.06 P2.5@1940.94,230.32 ; v2(1940.94,200.94) P2.5@1940.94,230.32 ; v2@1960,230.32 v2(1955,230.32) ; P2.5@1971.46,230.32 v2(1955,230.32) ; U2.23 U2.49@2009.84,427.17 ; U2.49@2009.84,604.33 U2.35 ; R11.2 2205,1417.91 v1(2205,1515) ; v2(2225,295) 2225,319.02 C53.1 ; v2(2265,295) 2266.81,296.81 R19.1 ; v2(2435,550) R14.2 ; R12.2 2595,1414.21 v1(2595,1515) ; R13.2@2990,1400.08 v1(2990,1515) ; P2.5@1940.94,230.32 v2(1955,230.32)
  other v1: 1935,115 1889.76,116.14 1835,120 1690,270 1475,315 1530,315 1455,640 1455,675 1270,695 1265,725 1265,755 1445,760 1358.27,767.72 1445,790 1265,865 1265,900 1260,935 1260,970 235,1520 1705,1575 2105,1575 2495,1575 3280,1575 530,1580 1310,1580 2885,1580 920,1585 850,1670 1250,1670 455,1675 1630,1675 2025,1675 2420,1675 2810,1675 3205,1675 196.85,1870.08 295.28,1870.08 492.13,1870.08 590.55,1870.08 688.98,1870.08 885.83,1870.08 984.25,1870.08 1082.68,1870.08 1279.53,1870.08 1377.95,1870.08 1476.38,1870.08 1673.23,1870.08 1771.65,1870.08 1870.08,1870.08 2066.93,1870.08 2165.35,1870.08 2263.78,1870.08 2460.63,1870.08 2559.06,1870.08 2657.48,1870.08 2854.33,1870.08 2952.76,1870.08 3051.18,1870.08 3248.03,1870.08 3346.46,1870.08 3444.88,1870.08 3641.73,1870.08 3740.16,1870.08 3838.58,1870.08 196.85,1968.5 295.28,1968.5 492.13,1968.5 590.55,1968.5 688.98,1968.5 885.83,1968.5 984.25,1968.5 1082.68,1968.5 1279.53,1968.5 1377.95,1968.5 1476.38,1968.5 1673.23,1968.5 1771.65,1968.5 1870.08,1968.5 2066.93,1968.5 2165.35,1968.5 2263.78,1968.5 2460.63,1968.5 2559.06,1968.5 2657.48,1968.5 2854.33,1968.5 2952.76,1968.5 3051.18,1968.5 3248.03,1968.5 3346.46,1968.5 3444.88,1968.5 3641.73,1968.5 3740.16,1968.5 3838.58,1968.5 196.85,2066.93 295.28,2066.93 492.13,2066.93 590.55,2066.93 688.98,2066.93 885.83,2066.93 984.25,2066.93 1082.68,2066.93 1279.53,2066.93 1377.95,2066.93 1476.38,2066.93 1673.23,2066.93 1771.65,2066.93 1870.08,2066.93 2066.93,2066.93 2165.35,2066.93 2263.78,2066.93 2460.63,2066.93 2559.06,2066.93 2657.48,2066.93 2854.33,2066.93 2952.76,2066.93 3051.18,2066.93 3248.03,2066.93 3346.46,2066.93 3444.88,2066.93 3641.73,2066.93 3740.16,2066.93 3838.58,2066.93 3740.16,2165.35 3838.58,2165.35 3740.16,2263.78 3838.58,2263.78 3740.16,2362.2 3838.58,2362.2 3740.16,2460.63 3838.58,2460.63 3740.16,2559.06 3740.16,2657.48 3838.58,2657.48 3740.16,2755.91 3838.58,2755.91 3740.16,2854.33 3838.58,2854.33 3740.16,2952.76 3838.58,2952.76 3740.16,3149.61 3838.58,3149.61 3740.16,3346.46 3838.58,3346.46
  other v2: 1338.58,748.03 1377.95,748.03 1338.58,787.4 1377.95,787.4
  other v3: 1834.65,429.13 1877.95,429.13 1921.26,429.13 1964.57,429.13 2007.87,429.13 1834.65,472.44 1877.95,472.44 1921.26,472.44 1964.57,472.44 2007.87,472.44 1834.65,515.75 1877.95,515.75 1921.26,515.75 1964.57,515.75 2007.87,515.75 1834.65,559.06 1877.95,559.06 1921.26,559.06 1964.57,559.06 2007.87,559.06 1834.65,602.36 1877.95,602.36 1921.26,602.36 1964.57,602.36 2007.87,602.36
  other v4: 2044.26,301.75 2086.26,301.75 2125.26,323.75 1656.26,515.75 1658.26,547.75 2115,610 1728.26,687.75
KEY5: C53.2 R19.2 SW5.1 U2.28 | length 375.9
  Top Layer w8: U2.28 2123.03,466.54 SW5.1 2208.27,516.73 2226.81,498.19 C53.2 R19.2
NetC1_2: C1.2 U2.6 X1.3 | length 126.3
  Top Layer w8: C1.2 X1.3@1686.26,552.75 ; C1.2@1691.1,525.59 U2.6
NetC2_2: C2.2 C38.2 D1.1 L12.2 R15.1 U5.14 | length 720.4
  Top Layer w10: C38.2 1200,649.76 1200,765 1212.81,777.81 1299.21,777.81 U5.14 ; C2.2 1496.24,576.24 1515,595 1515,670.04 R15.1
  Top Layer w20: C38.2 L12.2@1318.27,531.5 ; D1.1@1358.27,483.19 L12.2 1431.64,531.5 C2.2
NetC3_2: C3.2 U2.22 | length 47.1
  Top Layer w8: C3.2@1990.16,332.85 U2.22
NetC35_1: C35.1 C36.1 D2.2 U5.10 U5.11 U5.12 U5.13 | length 364.8
  Top Layer w10: U5.13 1299.21,832.68 1328.74,862.21 ; U5.12 1328.74,862.21 ; U5.11 C36.1@1348.43,881.89 ; C36.1 C36.1@1348.43,881.89 ; U5.10 C36.1@1368.11,870.08 ; 1328.74,862.21 C36.1@1348.43,881.89
  Top Layer w20: C36.1@1350,888.19 D2.2
NetC43_1: C43.1 U5.9 | length 80.6
  Top Layer w10: U5.9 1387.8,832.8 1401.46,846.46 C43.1
NetC52_2: C52.2 U2.5 X1.1 | length 279.7
  Top Layer w8: C52.2 1661.26,682.52 X1.1 1685.1,611.75 1731.4,611.75 1739.26,603.89 1739.26,563.75 1757.73,545.28 U2.5
NetD4_1: D4.1 P2.1 | length 176.3
  Top Layer w15: D4.1 1719.69,229.68 1755,265 1830,265 1838.58,256.42 P2.1
NetL12_1: L12.1 U5.1 U5.2 U5.3
NetLED1_1: LED1.1 U2.19 U3.2 | length 2004.3
  Top Layer w10: v2(715,935) 720,935 1225,430 1585,430 1610,405 1680,405 1760,325 1910,325 1931.1,346.1 U2.19 ; v2(715,1045) 742.13,1072.13 LED1.1
  Top Layer w20: LED1.1@742.72,1358.86 U3.2
  Bottom Layer w10: v2(715,935) v2(715,1045)
NetLED1_2: LED1.2 R7.1 | length 64.4
  Top Layer w20: R7.1 LED1.2
NetLED2_1: LED2.1 U2.46 U6.2 | length 1126.7
  Top Layer w10: LED2.1@1136.42,1358.86 1136.42,1323.58 v2(1300,1160) ; v2(1415,1155) 1852.36,717.64 U2.46
  Top Layer w20: LED2.1@1136.42,1358.86 U6.2
  Bottom Layer w10: v2(1300,1160) 1305,1155 v2(1415,1155)
NetLED2_2: LED2.2 R8.1 | length 64.4
  Top Layer w20: R8.1 LED2.2
NetLED3_1: LED3.1 U1.2 U2.18 | length 2072.3
  Top Layer w10: LED3.1 1256.69,450 1600,450 1625,425 1690,425 1770,345 1905,345 1911.42,351.42 U2.18
  Top Layer w20: LED3.1@349.02,1358.86 U1.2
NetLED3_2: LED3.2 R6.1 | length 64.4
  Top Layer w20: R6.1 LED3.2
NetLED4_1: LED4.1 U2.45 U7.2 | length 896.6
  Top Layer w10: 1556.14,1358.86 1865,1050 1865,730 1872.05,722.95 U2.45
  Top Layer w20: LED4.1@1530.12,1358.86 U7.2
NetLED4_2: LED4.2 R9.1 | length 64.4
  Top Layer w20: R9.1 LED4.2
NetLED5_1: LED5.1 U2.43 U8.2 | length 757.4
  Top Layer w10: U2.43 1914.26,654.42 LED5.1@1914.26,1349.3
  Top Layer w20: LED5.1@1923.82,1358.86 U8.2
NetLED5_2: LED5.2 R10.1 | length 64.4
  Top Layer w20: R10.1 LED5.2
NetLED6_1: LED6.1 U2.42 U9.2 | length 925
  Top Layer w10: U2.42 1931.1,972.44 LED6.1
  Top Layer w20: LED6.1@2317.52,1358.86 U9.2
NetLED6_2: LED6.2 R11.1 | length 64.4
  Top Layer w20: R11.1 LED6.2
NetLED7_1: LED7.1 U2.41 U10.2 | length 1218.9
  Top Layer w10: U2.41 1950.79,835.79 2375,1260 2612.36,1260 LED7.1
  Top Layer w20: LED7.1@2711.22,1358.86 U10.2
NetLED7_2: LED7.2 R12.1 | length 64.4
  Top Layer w20: R12.1 LED7.2
NetLED8_1: LED8.1 U2.40 U11.2 | length 1605
  Top Layer w10: U2.40 1970.47,735.47 2455,1220 3050,1220 3124.02,1294.02 LED8.1
  Top Layer w20: U11.2 3104.92,1389.33 3130,1364.25 LED8.1
NetLED8_2: LED8.2 R13.1 | length 64.4
  Top Layer w20: R13.1 LED8.2
NetLED9_1: LED9.1 U2.29 | length 335.6
  Top Layer w10: U2.29 2116.22,486.22 2140,510 2140,532.53 2157.48,550 2285,550 2306.5,571.5 LED9.1
NetLED9_2: LED9.2 R14.1 | length 65.9
  Top Layer w10: LED9.2 R14.1@2439.88,609.17
NetQ1_D: Q1.D R32.2
NetQ1_G: Q1.G R39.1 R40.1 | length 524.1
  Top Layer w6: v2(767.52,2207.52) Q1.G
  Top Layer w20: R39.1 R40.1
  Bottom Layer w6: v2(767.52,1752.52) v2(767.52,2207.52)
NetQ2_D: Q2.D R33.2
NetQ2_G: Q2.G R41.1 R42.1 | length 527.1
  Top Layer w6: v2(1160,2205) 1161.22,2206.22 Q2.G
  Top Layer w20: R41.1 R42.1
  Bottom Layer w6: v2(1160,1750) v2(1160,2205)
NetQ3_D: Q3.D R4.2
NetQ3_G: Q3.G R1.1 R3.1 | length 522.8
  Top Layer w6: v2(373.82,2201.18) Q3.G
  Top Layer w20: R3.1 R1.1
  Bottom Layer w6: v2(373.82,1753.82) v2(373.82,2201.18)
NetQ4_D: Q4.D R34.2
NetQ4_G: Q4.G R43.1 R44.1 | length 526.6
  Top Layer w6: Q4.G 1554.92,2205.08 v2(1555,2205)
  Top Layer w20: R43.1 R44.1
  Bottom Layer w6: v2(1555,1750) v2(1555,2205)
NetQ5_D: Q5.D R35.2
NetQ5_G: Q5.G R45.1 R46.1 | length 528.1
  Top Layer w6: v2(1945,2200) 1948.62,2203.62 Q5.G
  Top Layer w20: R45.1 R46.1
  Bottom Layer w6: v2(1945,1750) v2(1945,2200)
NetQ6_D: Q6.D R36.2
NetQ6_G: Q6.G R47.1 R48.1 | length 527.5
  Top Layer w6: v2(2340,2195) 2342.32,2197.32 Q6.G
  Top Layer w20: R47.1 R48.1
  Bottom Layer w6: v2(2340,1750) v2(2340,2195)
NetQ7_D: Q7.D R60.2
NetQ7_G: Q7.G R54.1 R56.1 | length 527
  Top Layer w6: v2(2735,2200) 2736.02,2201.02 Q7.G
  Top Layer w20: R54.1 R56.1
  Bottom Layer w6: v2(2735,1750) v2(2735,2200)
NetQ8_D: Q8.D R63.2
NetQ8_G: Q8.G R55.1 R57.1 | length 526.3
  Top Layer w6: v2(3129.72,2205.28) Q8.G
  Top Layer w20: R55.1 R57.1
  Bottom Layer w6: v2(3129.72,1750.28) v2(3129.72,2205.28)
NetR1_2: R1.2 U1.6 | length 60.9
  Top Layer w20: R1.2 393.7,1658.86 U1.6
NetR2_1: R2.1 R20.2
NetR2_2: R2.2 R4.1
NetR3_2: R3.2 U1.7 | length 60.9
  Top Layer w20: U1.7 354.33,1658.86 R3.2
NetR5_1: R5.1 U1.3 | length 212.5
  Top Layer w20: U1.3 399.02,1504.02 430.43,1535.43 R5.1
NetR15_2: R15.2 R17.1 U5.5 | length 82.7
  Top Layer w10: U5.5 1426.85,728.66 R15.2
NetR16_2: R16.2 R27.1
NetR18_2: R18.2 R28.1
NetR21_2: R21.2 R29.1
NetR22_2: R22.2 R30.1
NetR23_1: R23.1 SW5.2 | length 65.5
  Top Layer w15: SW5.2 2381.89,400.59 R23.1
NetR24_2: R24.2 R31.1
NetR27_2: R27.2 R32.1
NetR28_2: R28.2 R33.1
NetR29_2: R29.2 R34.1
NetR30_2: R30.2 R35.1
NetR31_2: R31.2 R36.1
NetR37_1: R37.1 U2.44 | length 97
  Top Layer w8: U2.44 R37.1@1891.73,748.58
NetR38_2: R38.2 U2.7 | length 94.6
  Top Layer w8: R38.2 1726.42,505.91 U2.7
NetR39_2: R39.2 U3.7 | length 60.9
  Top Layer w20: U3.7 748.03,1658.86 R39.2
NetR40_2: R40.2 U3.6 | length 60.9
  Top Layer w20: R40.2 787.4,1658.86 U3.6
NetR41_2: R41.2 U6.7 | length 60.9
  Top Layer w20: U6.7 1141.73,1658.86 R41.2
NetR42_2: R42.2 U6.6 | length 60.9
  Top Layer w20: R42.2 1181.1,1658.86 U6.6
NetR43_2: R43.2 U7.7 | length 60.9
  Top Layer w20: U7.7 1535.43,1658.86 R43.2
NetR44_2: R44.2 U7.6 | length 60.9
  Top Layer w20: R44.2 1574.8,1658.86 U7.6
NetR45_2: R45.2 U8.7 | length 60.9
  Top Layer w20: U8.7 1929.13,1658.86 R45.2
NetR46_2: R46.2 U8.6 | length 60.9
  Top Layer w20: R46.2 1968.5,1658.86 U8.6
NetR47_2: R47.2 U9.7 | length 60.9
  Top Layer w20: U9.7 2322.83,1658.86 R47.2
NetR48_2: R48.2 U9.6 | length 60.9
  Top Layer w20: R48.2 2362.2,1658.86 U9.6
NetR49_1: R49.1 U3.3 | length 208.8
  Top Layer w20: U3.3 792.72,1497.72 830.43,1535.43 R49.1
NetR50_1: R50.1 U6.3 | length 202.2
  Top Layer w20: U6.3 1186.42,1486.42 1235.43,1535.43 R50.1
NetR51_1: R51.1 U7.3 | length 198.5
  Top Layer w20: U7.3 1580.12,1480.12 1635.43,1535.43 R51.1
NetR52_1: R52.1 U8.3 | length 209.1
  Top Layer w20: U8.3@1973.82,1408.86 U8.3 1973.82,1483.82 2025.43,1535.43 R52.1
NetR53_1: R53.1 U9.3 | length 197
  Top Layer w20: U9.3 2367.52,1477.52 2425.43,1535.43 R53.1
NetR54_2: R54.2 U10.7 | length 60.9
  Top Layer w20: U10.7 2716.54,1658.86 R54.2
NetR55_2: R55.2 U11.7 | length 60.9
  Top Layer w20: U11.7 3110.24,1658.86 R55.2
NetR56_2: R56.2 U10.6 | length 60.9
  Top Layer w20: R56.2 2755.91,1658.86 U10.6
NetR57_2: R57.2 U11.6 | length 60.9
  Top Layer w20: R57.2 3149.61,1658.86 U11.6
NetR58_1: R58.1 U10.3 | length 193.3
  Top Layer w20: U10.3 2761.22,1471.22 2825.43,1535.43 R58.1
NetR59_1: R59.1 U11.3 | length 198.4
  Top Layer w20: U11.3 3154.92,1479.92 3210.43,1535.43 R59.1
NetR60_1: R60.1 R61.2
NetR61_1: R61.1 R62.2
NetR63_1: R63.1 R64.2
NetR64_1: R64.1 R65.2
NetU2_12: U2.12 | length 36.1
  Top Layer w8: v2(1751.26,402.75) 1755.99,407.48 U2.12
NetU2_13: U2.13
NetU2_14: U2.14
PA9: P4.1 R25.1 U2.30 | length 1847.7
  Top Layer w8: U2.30 2095.91,505.91 2120,530 2120,540 2220,640 3130,640 3460.59,970.59 P4.1 ; P4.1@3464.57,1093.74 R25.1
PA10: P4.2 R26.1 U2.31 | length 1743.9
  Top Layer w6: U2.31 2085.59,525.59 2215,655 3065,655 3360.59,950.59 P4.2 ; P4.2@3366.14,1095.32 R26.1
PA11: U2.32
PA12: U2.33
PA13: P2.3 U2.34 | length 1007.2
  Top Layer w8: P2.3 1889.76,206.33 1914.99,181.1 2201.1,181.1 v2(2340,320) ; U2.34 2104.65,584.65 v2(2105,585)
  Bottom Layer w8: v2(2105,585) 2170,585 2360,395 2360,340 v2(2340,320)
PA14: P2.2 U2.37 | length 1238.9
  Top Layer w8: P2.2 1864.17,185.83 1882.9,167.1 2232.1,167.1 v2(2380,315)
  Top Layer w10: U2.37 2029.53,674.53 2050,695 2120,695 v2(2165,650)
  Bottom Layer w10: v2(2165,650) 2380,435 v2(2380,315)
pads on no net: P2.4 SW5.3 SW5.4 U1.1 U1.4 U2.2 U2.3 U2.4 U2.10 U2.11 U2.15 U2.16 U2.17 U2.20 U2.21 U2.25 U2.26 U2.27 U2.38 U2.39 U3.1 U3.4 U4.4 U5.4 U6.1 U6.4 U7.1 U7.4 U8.1 U8.4 U9.1 U9.4 U10.1 U10.4 U11.1 U11.4

## Polygon pours and split planes (outlines as drawn)
GND on Top Layer "GND_L01_P002" (solid, remove dead copper, pour order 2): 0,1791.34 3937.01,1791.34 3937.01,3425.2 0,3425.2
GND on Bottom Layer "GND_L02_P000" (solid, remove dead copper, pour order 0): 0,0 0,3937.01 3937.01,3937.01 3937.01,0

## Keep-outs
Keep-Out Layer:
  the board outline again, w6

## Other copper
Top Layer:
  rectangle net NetL12_1: 1320,660 1375,700
  rectangle net GND: 1235,680 1295,765
  rectangle net GND: 1425,750 1465,805
  rectangle net NetQ3_D: 200,2430 390,2605
  rectangle net NetQ8_D: 2955,2430 3145,2605
  rectangle net NetQ7_D: 2560,2430 2750,2605
  rectangle net NetQ6_D: 2170,2430 2360,2605
  rectangle net NetQ5_D: 1775,2430 1965,2605
  rectangle net NetQ4_D: 1380,2430 1570,2605
  rectangle net NetQ2_D: 990,2430 1180,2605
  rectangle net NetQ1_D: 595,2430 785,2605
  rectangle net 12V-E: 3228.35,2322.83 3661.42,2952.76
  rectangle net 12V-E: 3228.35,2834.65 3543.31,3208.66
  rectangle net 12V-E: 3228.35,3169.29 3681.1,3582.68
  rectangle net 12V-E: 98.43,3503.94 3681.1,3877.95

## Silkscreen, mask and mechanical layers (free items; w line width, h text height)
Top Overlay:
  lines w19.68: 3937.01,118.11 2480.31,118.11 2480.31,1181.1 3937.01,1181.1
  text "SW" at 1515.75,59.06 h100
Top Solder:
  rectangle: 145,1805 3865,2160
  rectangle: 3275,2350 3530,3815
  rectangle: 125,3580 3655,3855